# EAGLE board Venus638FLPX-L (EAGLE 6.3)
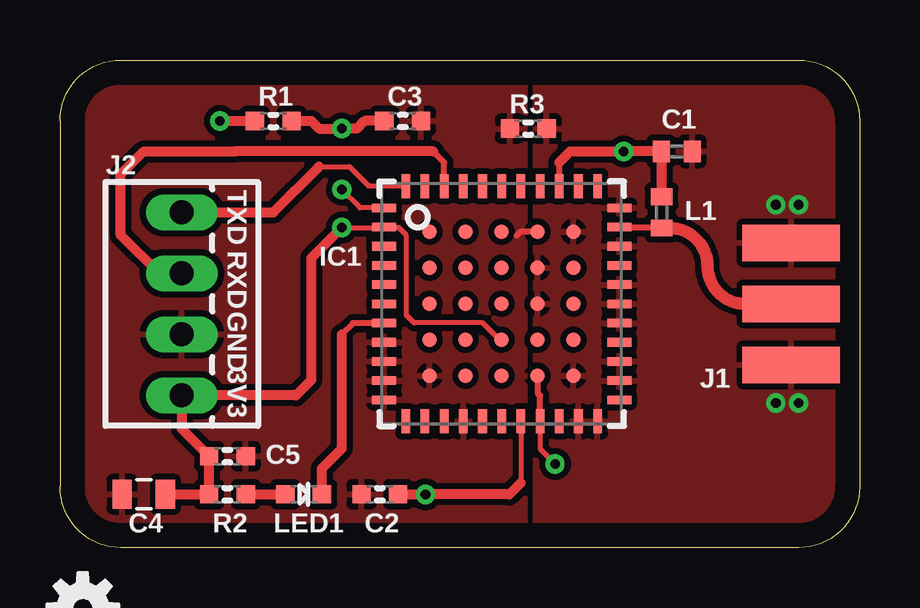
[diagram p0: board, top side]
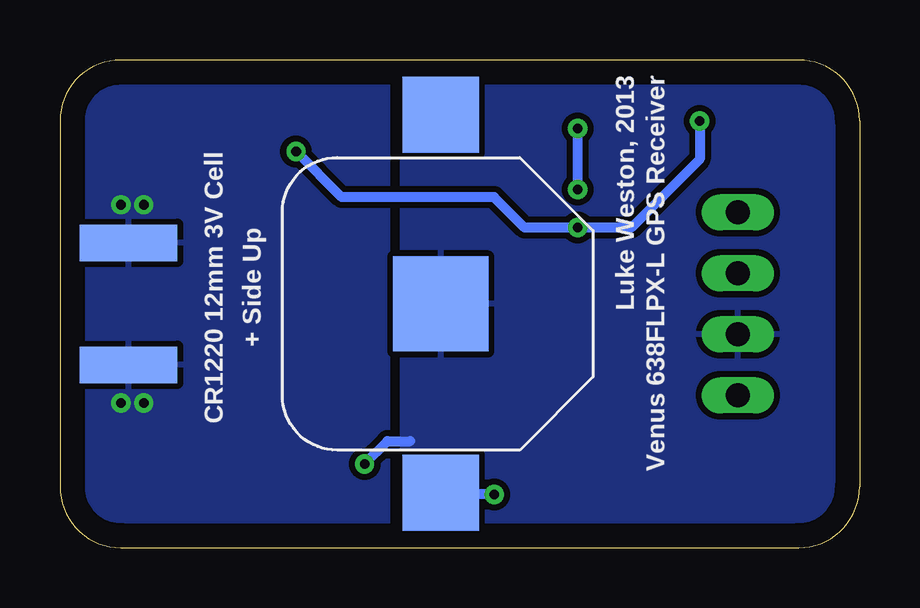
[diagram p1: board, bottom side, seen from below]

Size 33.34 x 20.32 mm. Coordinates in mm from the lower left corner, seen from the top.
Outline: 0,17.78 0,2.54 arc90 2.54,0 30.8,0 arc90 33.34,2.54 33.34,17.78 arc90 30.8,20.32 2.54,20.32 arc90 0,17.78
Copper layers (1*16): Top 0.035mm / dielectric 1.5mm / Bottom 0.035mm
Design rules "default *": minimum track width 10mil, minimum drill 24mil, track to track 8mil, track to pad 8mil, pad to pad 8mil, via to via 8mil, smd to smd 8mil, copper to edge 40mil, drill to drill 8mil, minimum pad ring 10mil, minimum via ring 8mil, stop-mask expansion 4mil, vias tented up to drill 16mil, thermal gap 10mil

## Footprints (pad centres in the part's own frame; a part is rotated, then mirrored left to right if it is on the bottom)
BATTCON_12MM = smd 3.962 x 3.962: GND 0,0 | smd 3.175 x 3.175: PWR@1 -7.874,0; PWR@2 7.874,0
C0402 = smd 0.7 x 0.9: 1 -0.65,0; 2 0.65,0
0603 = smd 0.762 x 0.762: 1 -0.762,0; 2 0.762,0
0805 = smd 0.8 x 1.2: 1 -0.9,0; 2 0.9,0
VENUS638FLPX = smd 1 x 0.36: 1 -4.9,4; 2 -4.9,3.2; 3 -4.9,2.4; 4 -4.9,1.6; 5 -4.9,0.8; 6 -4.9,0; 7 -4.9,-0.8; 8 -4.9,-1.6; 9 -4.9,-2.4; 10 -4.9,-3.2; 11 -4.9,-4; 23 4.9,-4; 24 4.9,-3.2; 25 4.9,-2.4; 26 4.9,-1.6; 27 4.9,-0.8; 28 4.9,0; 29 4.9,0.8; 30 4.9,1.6; 31 4.9,2.4; 32 4.9,3.2; 33 4.9,4 | smd 0.36 x 1: 12 -4,-4.9; 13 -3.2,-4.9; 14 -2.4,-4.9; 15 -1.6,-4.9; 16 -0.8,-4.9; 17 0,-4.9; 18 0.8,-4.9; 19 1.6,-4.9; 20 2.4,-4.9; 21 3.2,-4.9; 22 4,-4.9; 34 4,4.9; 35 3.2,4.9; 36 2.4,4.9; 37 1.6,4.9; 38 0.8,4.9; 39 0,4.9; 40 -0.8,4.9; 41 -1.6,4.9; 42 -2.4,4.9; 43 -3.2,4.9; 44 -4,4.9 | smd 0.6 x 0.6: 45 -3,3; 46 -3,1.5; 47 -3,0; 48 -3,-1.5; 49 -3,-3; 50 -1.5,3; 51 -1.5,1.5; 52 -1.5,0; 53 -1.5,-1.5; 54 -1.5,-3; 55 0,3; 56 0,1.5; 57 0,0; 58 0,-1.5; 59 0,-3; 60 1.5,3; 61 1.5,1.5; 62 1.5,0; 63 1.5,-1.5; 64 1.5,-3; 65 3,3; 66 3,1.5; 67 3,0; 68 3,-1.5; 69 3,-3
SMA-EDGE = smd 1.524 x 4.064: GND@0 0,0; GND@1 5.08,0; SIG 2.54,0 | smd 1.524 x 4.064 bottom: GND@2 0,0; GND@3 5.08,0
22-23-2041 = drill 1 long: 1 -3.81,0; 2 -1.27,0; 3 1.27,0; 4 3.81,0
LED-0603 = smd 0.762 x 0.762: A -0.762,0; C 0.762,0

## Placement (x,y rotation side)
B1  Keystone 3000  [BATTCON_12MM]  17.46,10.16 90 bottom
C1  22pF  [C0402]  25.72,16.51 180 top
C2  100nF  [0603]  13.34,2.22 0 top
C3  100nF  [0603]  14.29,17.78 180 top
C4  10µF  [0805]  3.49,2.22 0 top
C5  100nF  [0603]  6.98,3.81 180 top
IC1  VENUS638FLPX-L  [VENUS638FLPX]  18.41,10.16 0 top
J1  Antenna  [SMA-EDGE]  30.48,7.62 90 top
J2  Interface  [22-23-2041]  5.08,10.16 270 top
L1  33nH  [C0402]  25.08,13.97 270 top
LED1  Status  [LED-0603]  10.16,2.22 0 top
R1  33kΩ  [0603]  8.89,17.78 0 top
R2  470Ω  [0603]  6.98,2.22 0 top
R3  0Ω  [0603]  19.53,17.46 0 top
SY  OSHW-LOGOS  [OSHW-LOGO-S]  0.95,-2.54 0 top

## Library data of the parts
B1 J1 SY = SparkFun
C1 = freetronics-master-v1; PACKAGE: 0402
C2 C3 C5 R1-R3 = freetronics-master-v1; PACKAGE: 0603
C4 = freetronics-master-v1; PACKAGE: 0805
IC1 = mike-temp
J2 = con-molex; MF: MOLEX; MPN: 22-23-2041; OC_FARNELL: 1462920; OC_NEWARK: 38C0355
L1 = SparkFun; PACKAGE: 0402
LED1 = freetronics-master-v1; COLOUR: Yellow; PACKAGE: 0603

## Nets
+3.3V: C1.2 C4.2 C5.2 IC1.2 IC1.36 IC1.58 J2.4 L1.1 R1.1 R2.1
ANT2: IC1.32 J1.SIG L1.2
GND: B1.GND C2.1 C3.1 C4.1 C5.1 IC1.8 IC1.9 IC1.10 IC1.11 IC1.15 IC1.19 IC1.49 IC1.60 IC1.64 J2.3 R3.1
N$1: C3.2 IC1.1 R1.2
N$4: B1.PWR@1 C2.2 IC1.18
N$28: IC1.7 LED1.C
N$31: LED1.A R2.2
RFGND: C1.1 IC1.21 IC1.22 IC1.24 IC1.25 IC1.27 IC1.28 IC1.29 IC1.31 IC1.33 IC1.61 IC1.62 IC1.65 IC1.69 J1.GND@0 J1.GND@1 J1.GND@2 J1.GND@3 R3.2
RXD: IC1.42 J2.2
TXD: IC1.44 J2.1

## Tracks (layer width: path | path; a pad name or v marks a point on that pad's centre or on a via)
+3.3V  (via drill 0.4)
  Top 0.203: IC1.58 18.33,8.66 17.62,9.37 14.76,9.37 14.45,9.68 14.45,13.02 14.13,13.34 13.54,13.34 IC1.2 13.49,13.34 v11.75,13.34
  Top 0.254: 20.82,16.05 IC1.36 20.8,15.04 | 25.08,16.51 C1.2
  Top 0.406: 20.82,16.05 21.27,16.51 v23.5,16.51 C1.2 | 25.08,16.51 L1.1 | C4.2 R2.1 C5.2 5.08,4.95 J2.4 9.84,6.35 10.48,6.98 10.48,12.07 v11.75,13.34 | v6.67,17.78 R1.1
  Bottom 0.406: v6.67,17.78 6.67,16.19 9.53,13.34 v11.75,13.34 13.97,13.34 15.24,14.61 21.59,14.61 v23.5,16.51
ANT2
  Top 0.254: IC1.32 25.04,13.36 L1.2 25.41,13.32 | 28.57,10.16 J1.SIG
  Top 0.508: 25.41,13.32 arc-90 26.99,11.75 arc90 28.57,10.16
GND  (via drill 0.4)
  Top 0.203: IC1.19 20.02,4.12 v20.64,3.49
  Top 0.254: IC1.64 19.91,6.44 20.02,6.34 IC1.19 | IC1.60 19.19,13.16 19.05,13.02
  Bottom 0.406: v20.64,3.49 19.68,4.45 18.73,4.45
  pour Top (isolate 0.254): -0.63,20.95 19.37,20.95 19.37,-0.63 -0.63,-0.63
  pour Bottom (isolate 0.254): -0.63,20.95 19.05,20.95 19.05,-0.63 -0.63,-0.63
N$1  (via drill 0.4)
  Top 0.203: IC1.1 12.51,14.16 v11.75,14.92
  Top 0.406: C3.2 12.7,17.78 12.38,17.46 v11.75,17.46 10.8,17.46 10.48,17.78 R1.2
  Bottom 0.406: v11.75,14.92 v11.75,17.46
N$4  (via drill 0.4)
  Top 0.203: IC1.18 19.21,2.71
  Top 0.406: 19.21,2.71 18.73,2.22 v15.24,2.22 C2.2
  Bottom 0.254: 16.76,2.22 B1.PWR@1
  Bottom 0.406: v15.24,2.22 16.76,2.22
N$28
  Top 0.254: IC1.7 12.22,9.36 11.75,8.89
  Top 0.406: 11.75,8.89 11.75,4.13 10.92,3.3 LED1.C
N$31
  Top 0.406: R2.2 LED1.A
RFGND  (via drill 0.4)
  other vias: 29.85,14.29 30.8,14.29 29.85,6.03 30.8,6.03
  pour Top (isolate 0.254): 19.84,20.95 33.97,20.95 33.97,-0.63 19.84,-0.63
  pour Bottom (isolate 0.254): 19.68,20.95 33.97,20.95 33.97,-0.63 19.68,-0.63
RXD
  Top 0.254: IC1.42 16.02,16.05 15.56,16.51
  Top 0.406: 15.56,16.51 7.3,16.51 3.49,16.51 2.54,15.56 2.54,13.02 4.13,11.43 J2.2
TXD
  Top 0.203: 10.8,15.88 12.07,15.88 12.88,15.06 IC1.44
  Top 0.406: J2.1 8.89,13.97 10.8,15.88

## Text on the board
tPlace: TXD | RXD | GND | 3V3
bPlace: Venus 638FLPX-L GPS Receiver | Luke Weston, 2013 | CR1220 12mm 3V Cell | + Side Up
tNames: J1